# Altium PCB HALL_SENSOR_BOARD.PcbDoc
Units mm, origin at the board's own origin, x right, y up, seen from the top; angles counter-clockwise.
Board outline 80 x 80 mm, 2 copper layers (Top Layer, Bottom Layer), stack 1.071 mm thick; 36 components, 22 nets, 90 pads, 18 vias.
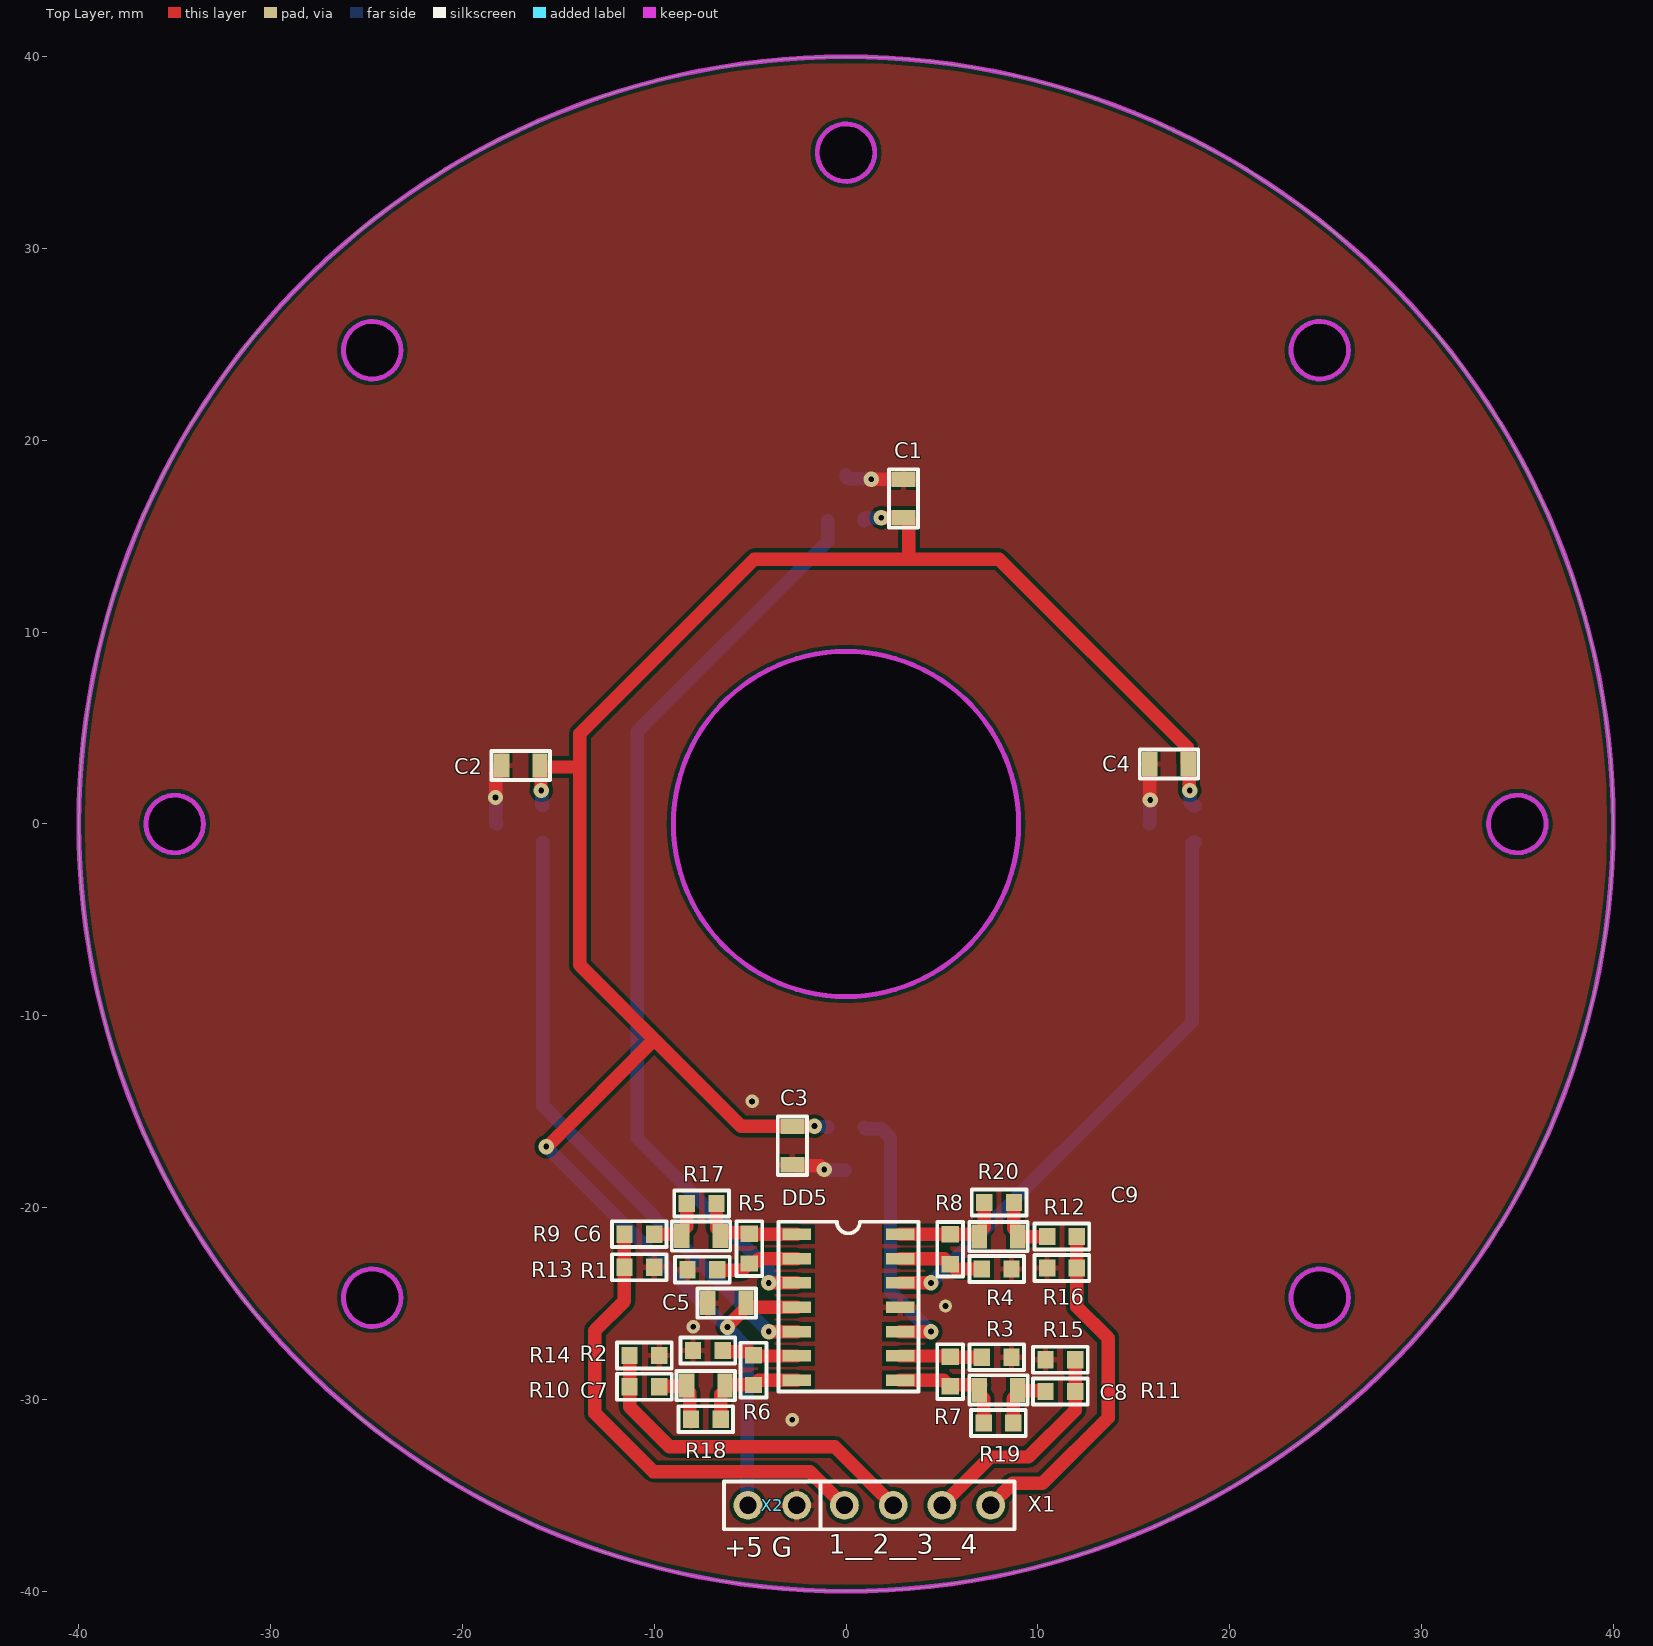
[diagram p0: Top Layer view]
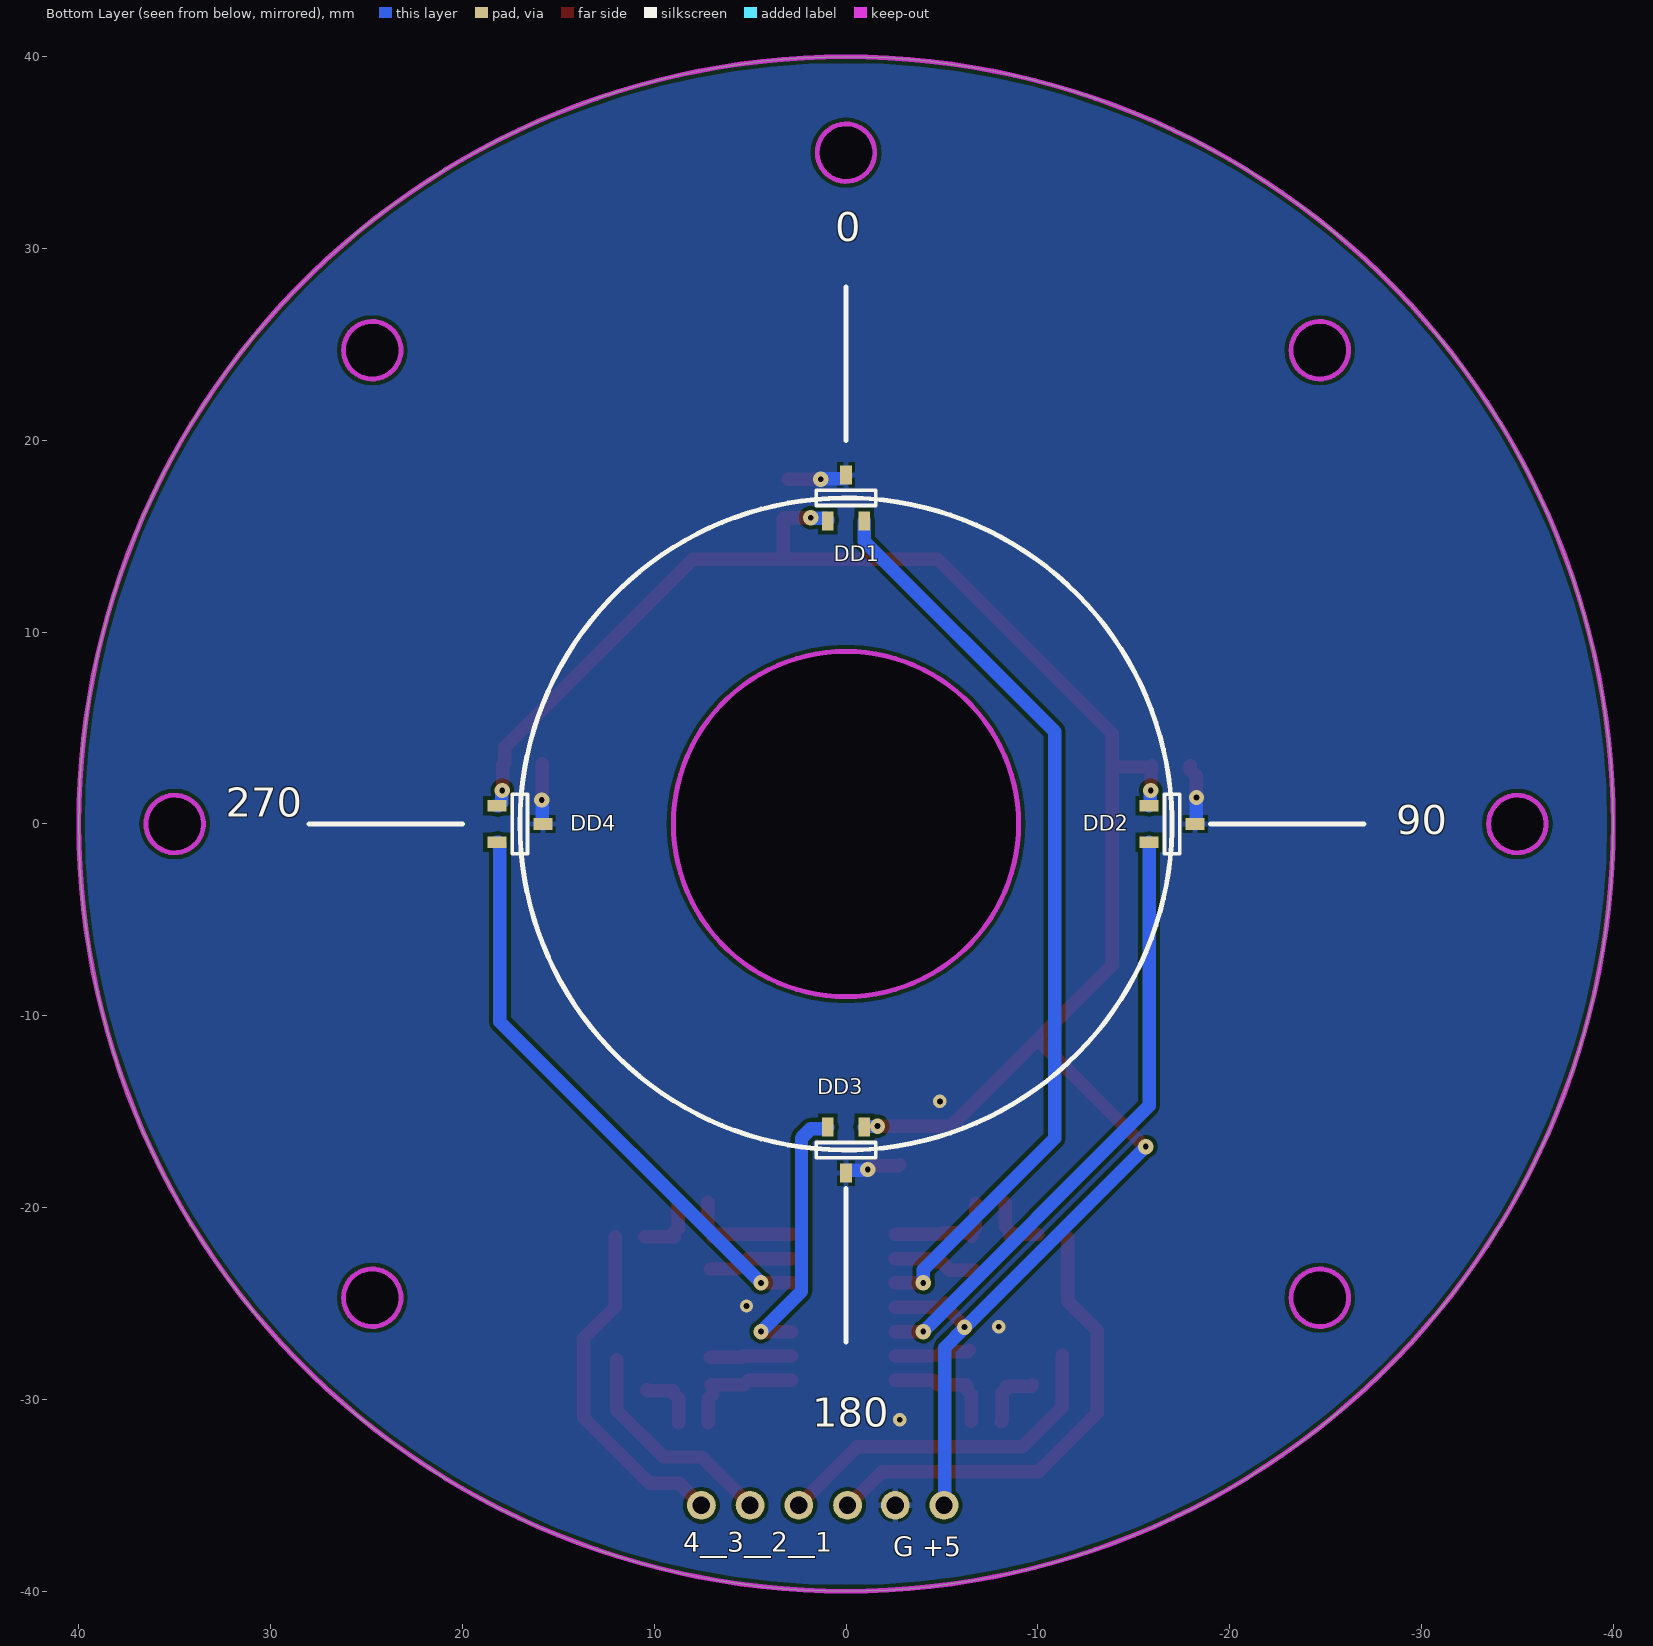
[diagram p1: Bottom Layer view, seen from below]
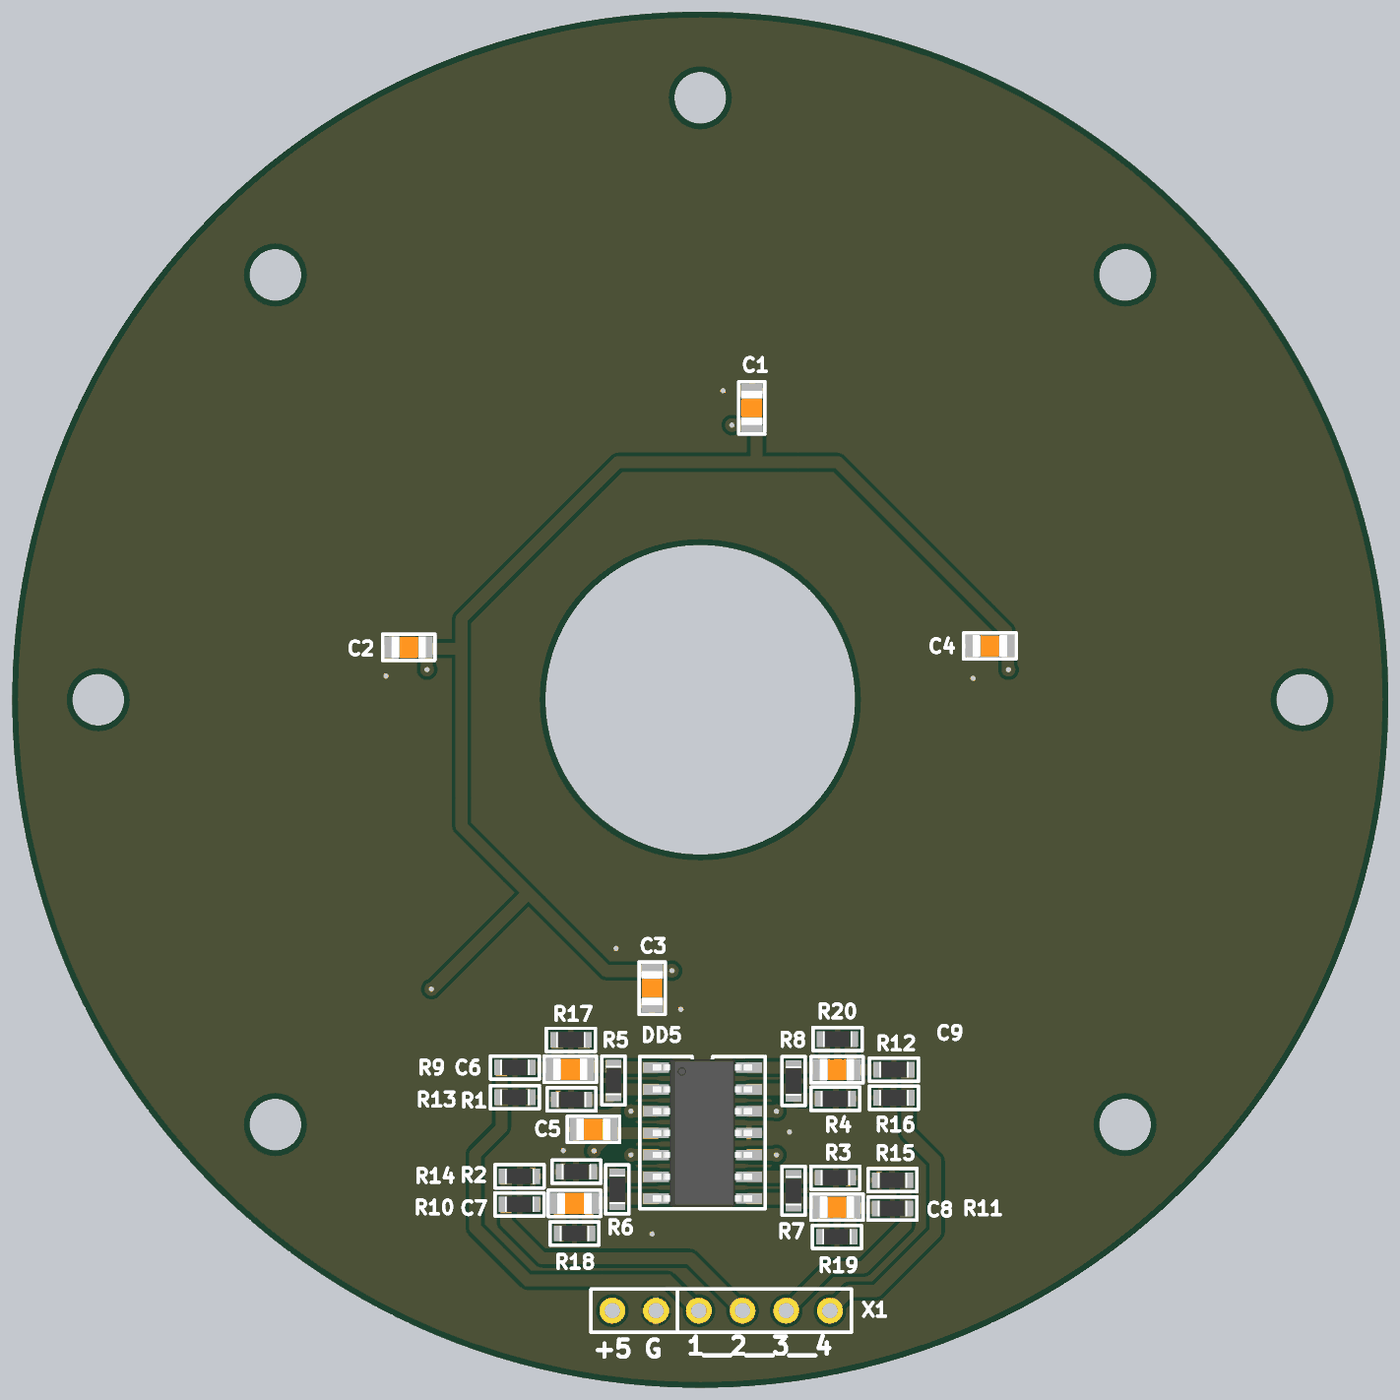
[diagram p2: 3D render of the assembled board from above, using the file's embedded part models]
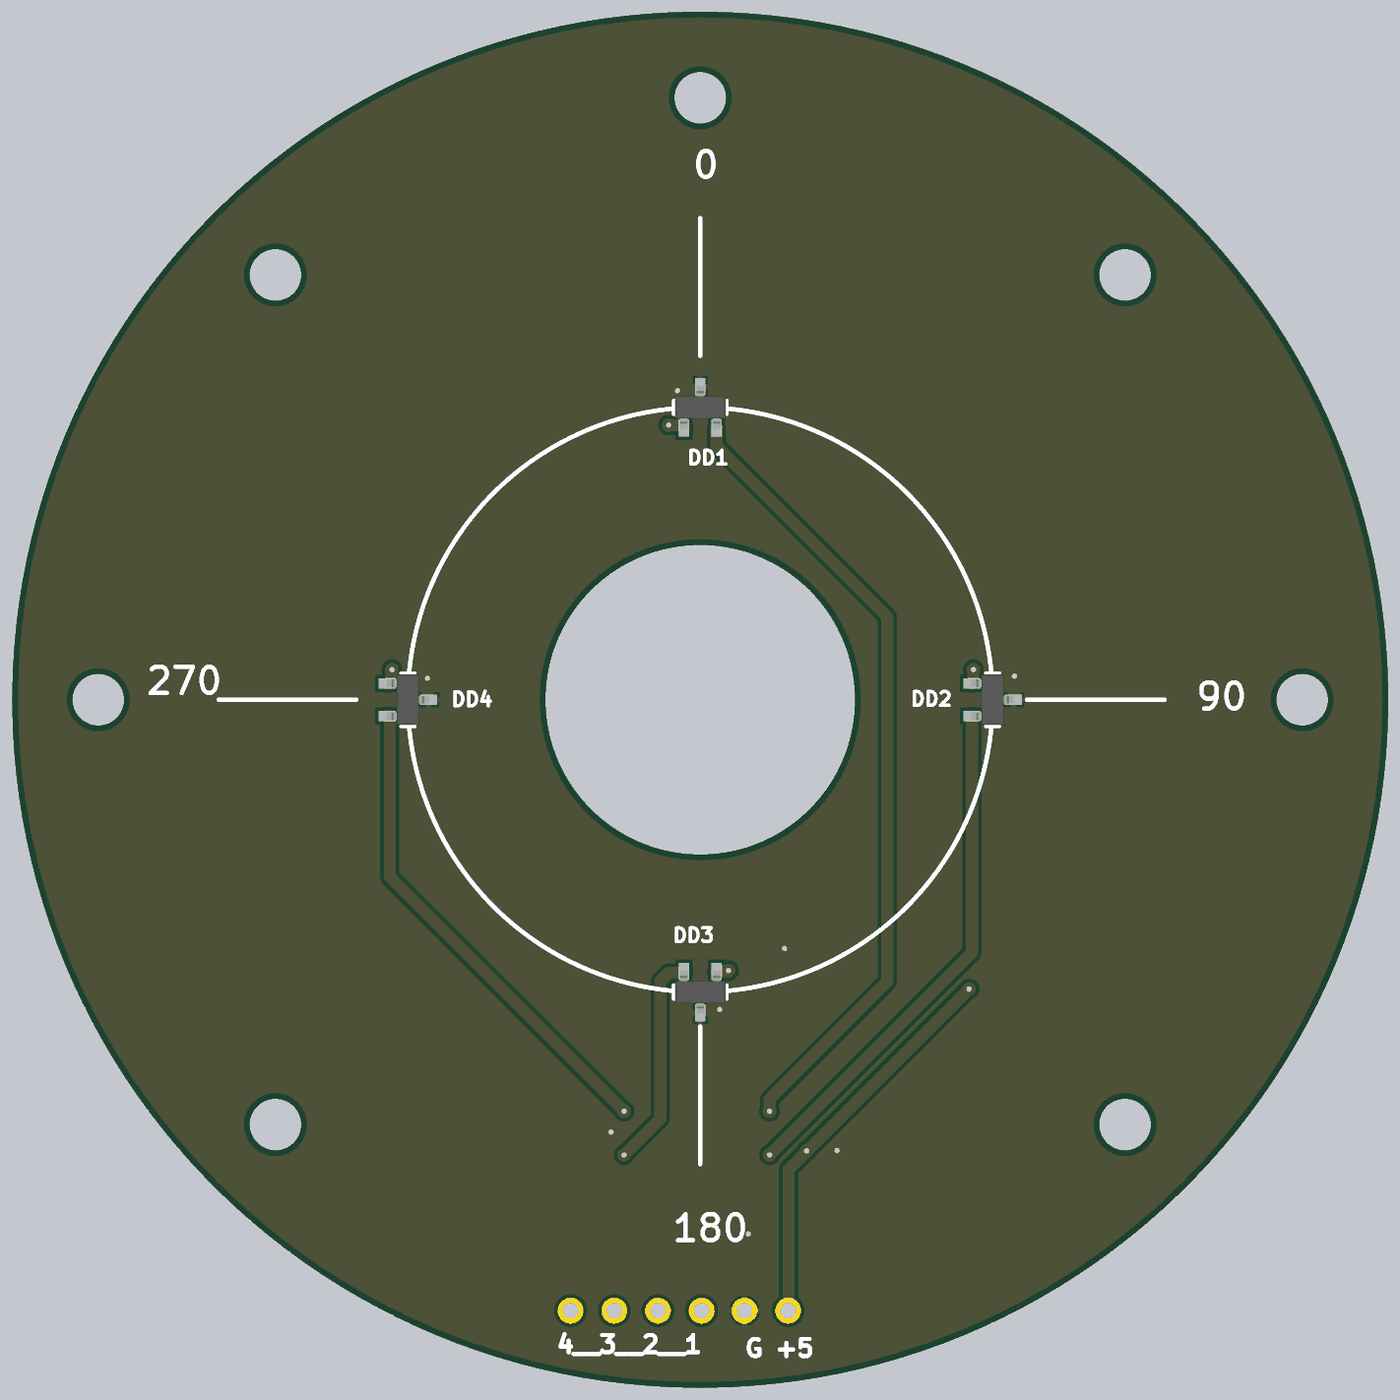
[diagram p3: 3D render of the assembled board from below, using the file's embedded part models]

## Layer stack, top to bottom
Top Solder: solder mask 0.0102, Solder Resist, Dk 3.5
Top Layer: signal copper 0.0356
Dielectric 1: dielectric 1, FR-4, Dk 4.8
Bottom Layer: signal copper 0.0356
Bottom Solder: solder mask 0.0102, Solder Resist, Dk 3.5

## Board outline
-40,0 ccw(c0,0) 0,-40 ccw(c0,0) 40,0 ccw(c0,0) 0,40 ccw(c0,0)
cut-out: -26.2,-24.7 ccw(c-24.7,-24.7) -24.7,-26.2 ccw(c-24.7,-24.7) -23.2,-24.7 ccw(c-24.7,-24.7) -24.7,-23.2 ccw(c-24.7,-24.7)
cut-out: 23.2,-24.7 ccw(c24.7,-24.7) 24.7,-26.2 ccw(c24.7,-24.7) 26.2,-24.7 ccw(c24.7,-24.7) 24.7,-23.2 ccw(c24.7,-24.7)
cut-out: -26.2,24.7 ccw(c-24.7,24.7) -24.7,23.2 ccw(c-24.7,24.7) -23.2,24.7 ccw(c-24.7,24.7) -24.7,26.2 ccw(c-24.7,24.7)
cut-out: 23.2,24.7 ccw(c24.7,24.7) 24.7,23.2 ccw(c24.7,24.7) 26.2,24.7 ccw(c24.7,24.7) 24.7,26.2 ccw(c24.7,24.7)
cut-out: -36.5,0 ccw(c-35,0) -35,-1.5 ccw(c-35,0) -33.5,0 ccw(c-35,0) -35,1.5 ccw(c-35,0)
cut-out: 33.5,0 ccw(c35,0) 35,-1.5 ccw(c35,0) 36.5,0 ccw(c35,0) 35,1.5 ccw(c35,0)
cut-out: -1.5,35 ccw(c0,35) 0,33.5 ccw(c0,35) 1.5,35 ccw(c0,35) 0,36.5 ccw(c0,35)
cut-out: -9,0 ccw(c0,0) 0,-9 ccw(c0,0) 9,0 ccw(c0,0) 0,9 ccw(c0,0)

## Design rules (kind name [scope] priority, off if disabled: settings)
Clearance [All] p1: gap=0.2 ignorepadtopadclearanceinfootprint=FALSE except(0.15: SMDPad-SMDPad)
DiffPairsRouting [All] p1: maxlimit=0.254 minlimit=0.254 mostfreqgap=0.254 substack1={A23D90DD-733B-49C5-8102-56B3D284E3A0} toplayer_{a23d90dd-733b-49c5-8102-56b3d284e3a0}_minwidth=0.381 toplayer_{a23d90dd-733b-49c5-8102-56b3d284e3a0}_maxwidth=0.381 toplayer_{a23d90dd-733b-49c5-8102-56b3d284e3a0}_prefwidth=0.381 bottomlayer_{a23d90dd-733b-49c5-8102-56b3d284e3a0}_minwidth=0.381 bottomlayer_{a23d90dd-733b-49c5-8102-56b3d284e3a0}_maxwidth=0.381 bottomlayer_{a23d90dd-733b-49c5-8102-56b3d284e3a0}_prefwidth=0.381 toplayer_minwidth=0.381 toplayer_maxwidth=0.381 toplayer_prefwidth=0.381 bottomlayer_minwidth=0.381 bottomlayer_maxwidth=0.381 bottomlayer_prefwidth=0.381 substack2={0B3DB408-A969-412D-8C07-BA8AE97219D9} toplayer_{0b3db408-a969-412d-8c07-ba8ae97219d9}_minwidth=0.381 toplayer_{0b3db408-a969-412d-8c07-ba8ae97219d9}_maxwidth=0.381 toplayer_{0b3db408-a969-412d-8c07-ba8ae97219d9}_prefwidth=0.381 bottomlayer_{0b3db408-a969-412d-8c07-ba8ae97219d9}_minwidth=0.381 bottomlayer_{0b3db408-a969-412d-8c07-ba8ae97219d9}_maxwidth=0.381 bottomlayer_{0b3db408-a969-412d-8c07-ba8ae97219d9}_prefwidth=0.381 substack3={378827E6-B38F-4565-9D2F-710D8D441C30} toplayer_{378827e6-b38f-4565-9d2f-710d8d441c30}_minwidth=0.381 toplayer_{378827e6-b38f-4565-9d2f-710d8d441c30}_maxwidth=0.381 toplayer_{378827e6-b38f-4565-9d2f-710d8d441c30}_prefwidth=0.381 bottomlayer_{378827e6-b38f-4565-9d2f-710d8d441c30}_minwidth=0.381 bottomlayer_{378827e6-b38f-4565-9d2f-710d8d441c30}_maxwidth=0.381 bottomlayer_{378827e6-b38f-4565-9d2f-710d8d441c30}_prefwidth=0.381 substack4={1E65D4A7-266F-4925-B814-5E9C4A66F8EE} toplayer_{1e65d4a7-266f-4925-b814-5e9c4a66f8ee}_minwidth=0.381 toplayer_{1e65d4a7-266f-4925-b814-5e9c4a66f8ee}_maxwidth=0.381 toplayer_{1e65d4a7-266f-4925-b814-5e9c4a66f8ee}_prefwidth=0.381 bottomlayer_{1e65d4a7-266f-4925-b814-5e9c4a66f8ee}_minwidth=0.381 bottomlayer_{1e65d4a7-266f-4925-b814-5e9c4a66f8ee}_maxwidth=0.381 bottomlayer_{1e65d4a7-266f-4925-b814-5e9c4a66f8ee}_prefwidth=0.381 substack5={93C5D03E-862D-45F8-9871-970EEA9B3F11} toplayer_{93c5d03e-862d-45f8-9871-970eea9b3f11}_minwidth=0.381 toplayer_{93c5d03e-862d-45f8-9871-970eea9b3f11}_maxwidth=0.381 toplayer_{93c5d03e-862d-45f8-9871-970eea9b3f11}_prefwidth=0.381 bottomlayer_{93c5d03e-862d-45f8-9871-970eea9b3f11}_minwidth=0.381 bottomlayer_{93c5d03e-862d-45f8-9871-970eea9b3f11}_maxwidth=0.381 bottomlayer_{93c5d03e-862d-45f8-9871-970eea9b3f11}_prefwidth=0.381 maxuncoupledlength=12.7
HoleSize [All] p1: absolutevalues=TRUE maxlimit=6 minlimit=0.01 maxpercent=80.000 minpercent=20.000
HoleToHoleClearance [All] p1: gap=0.1 allowstackedmicrovias=TRUE
MinimumSolderMaskSliver [All] p1: minsoldermaskwidth=0.1
PlaneConnect [All] p1: pad.planeconnectstyle=Relief pad.reliefexpansion=0.5 pad.reliefentries=4 pad.reliefconductorwidth=0.5 pad.reliefairgap=0.15 via.planeconnectstyle=Direct via.reliefexpansion=0.5 via.reliefentries=4 via.reliefconductorwidth=0.5 via.reliefairgap=0.15
PolygonConnect VQFN20 [HasFootprint('VQFN20')] p1: connectstyle=Direct reliefconductorwidth=0.254 reliefentries=4 polygonreliefangle="90 Angle" airgapwidth=0.254
PolygonConnect [All] p2: thpad.connectstyle=Relief thpad.reliefconductorwidth=0.3 thpad.reliefentries=4 thpad.polygonreliefangle="90 Angle" thpad.airgapwidth=0.15 smdpad.connectstyle=Relief smdpad.reliefconductorwidth=0.3 smdpad.reliefentries=4 smdpad.polygonreliefangle="90 Angle" smdpad.airgapwidth=0.15 via.connectstyle=Direct via.reliefconductorwidth=0.3 via.reliefentries=4 via.polygonreliefangle="90 Angle" via.airgapwidth=0.15
RoutingVias [All] p1: holewidth=0.1 width=0.1 viastyle="Through Hole" minholewidth=0.11 minwidth=0.1 maxholewidth=2 maxwidth=1
ShortCircuit [All] p1: allowed=TRUE
SilkToSolderMaskClearance [IsPad] p1: minsilkscreentomaskgap=0.1 clearancetoexposedcopper=TRUE
SolderMaskExpansion SolderMaskExpansion_Via [IsVia] p1: expansion=0.102 istentingtop=TRUE
SolderMaskExpansion [All] p2: expansion=0.01 istentingtop=FALSE
UnRoutedNet [All] p1: checkbadconnections=TRUE
Width [All] p1: maxlimit=5 minlimit=0.2 preferedwidth=0.3 substack1={A23D90DD-733B-49C5-8102-56B3D284E3A0} substack2={0B3DB408-A969-412D-8C07-BA8AE97219D9} substack3={378827E6-B38F-4565-9D2F-710D8D441C30} substack4={1E65D4A7-266F-4925-B814-5E9C4A66F8EE} substack5={93C5D03E-862D-45F8-9871-970EEA9B3F11}
22 further rules are at their usual default settings.

## Components (designator, comment, footprint, x,y, rotation, side; value= is the part's Value field where it differs from the comment)
C1 "CAP-NON-POLAR" CAP-0805 3,16.97 r270 top
C2 "CAP-NON-POLAR" CAP-0805 -16.95,3.05 r0 top
C3 "CAP-NON-POLAR" CAP-0805 -2.798,-16.768 r90 top
C4 "CAP-NON-POLAR" CAP-0805 16.84,3.13 r0 top
C5 "CAP-NON-POLAR" CAP-0805 -6.21,-24.98 r0 top
C6 "CAP-NON-POLAR" CAP-0805 -7.56,-21.49 r0 top
C7 "CAP-NON-POLAR" CAP-0805 -7.31,-29.28 r0 top
C8 "CAP-NON-POLAR" CAP-0805 7.95,-29.5 r180 top
C9 "CAP-NON-POLAR" CAP-0805 7.95,-21.51 r180 top
DD1 "49E" SOT23-3 0,17 r90 bottom locked
DD2 "49E" SOT23-3 -17,0 r180 bottom locked
DD3 "49E" SOT23-3 0,-17 r270 bottom locked
DD4 "49E" SOT23-3 17,0 r180 bottom locked
DD5 "LM324" SOIC14 0.13,-25.19 r0 top
R1 "RES-CONST" RES-0603 -7.485,-23.235 r0 top
R2 "RES-CONST" RES-0603 -7.2,-27.445 r0 top
R3 "RES-CONST" RES-0603 7.855,-27.795 r180 top
R4 "RES-CONST" RES-0603 7.855,-23.2 r180 top
R5 "RES-CONST" RES-0603 -5.04,-22.135 r90 top
R6 "RES-CONST" RES-0603 -4.825,-28.47 r270 top
R7 "RES-CONST" RES-0603 5.43,-28.545 r270 top
R8 "RES-CONST" RES-0603 5.43,-22.17 r90 top
R9 "RES-CONST" RES-0603 -10.775,-21.385 r0 top
R10 "RES-CONST" RES-0603 -10.51,-29.34 r0 top
R11 "RES-CONST" RES-0603 11.18,-29.585 r180 top
R12 "RES-CONST" RES-0603 11.26,-21.51 r180 top
R13 "RES-CONST" RES-0603 -10.775,-23.11 r180 top
R14 "RES-CONST" RES-0603 -10.51,-27.705 r180 top
R15 "RES-CONST" RES-0603 11.18,-27.93 r0 top
R16 "RES-CONST" RES-0603 11.26,-23.145 r0 top
R17 "RES-CONST" RES-0603 -7.525,-19.78 r0 top
R18 "RES-CONST" RES-0603 -7.31,-31.03 r0 top
R19 "RES-CONST" RES-0603 7.95,-31.23 r180 top
R20 "RES-CONST" RES-0603 7.98,-19.73 r180 top
X1 "CONN-4-PIN" CONN-PLS-4-2.54mm -0.08,-35.52 r0 top locked
X2 "CONN-2-PIN" CONN-PLS-2-2.54mm -2.57,-35.52 r180 top locked

## Footprints (in the part's own frame and the unit in brackets; to place one, negate y for a bottom-side part, rotate by r counter-clockwise, add the part's x,y. Pads: shape width x height; smd on the part's side, far side on the other; paste and mask are expansions set on the pad)
CAP-0805 [mm]
  rect 0.8x1.25 smd mask+0.015: 1(-1,0) 2(1,0)
  silkscreen extent -1.52,-0.76 1.52,0.76, body extent -1,-0.62 1,0.63, height 0.8
CONN-PLS-2-2.54mm [mm]
  round 1.5 hole 0.9: 1(0,0) 2(2.54,0)
  silkscreen extent -1.25,-1.25 3.79,1.25
CONN-PLS-4-2.54mm [mm]
  round 1.5 hole 0.9: 1(0,0) 2(2.54,0) 3(5.08,0) 4(7.62,0)
  silkscreen extent -1.25,-1.25 8.87,1.25
RES-0603 [mm]
  rect 0.85x0.9 smd: 1(-0.775,0) 2(0.775,0)
  silkscreen extent -1.43,-0.67 1.43,0.67, body extent -0.85,-0.45 0.85,0.45, height 0.55
SOIC14 [mm]
  rect 1.5x0.6 smd: 1(-2.7,3.805) 2(-2.7,2.535) 3(-2.7,1.265) 4(-2.7,-0.005) 5(-2.7,-1.275) 6(-2.7,-2.545) 7(-2.7,-3.815) 8(2.7,-3.815) 9(2.7,-2.545) 10(2.7,-1.275) 11(2.7,-0.005) 12(2.7,1.265) 13(2.7,2.535) 14(2.7,3.805)
  silkscreen extent -3.65,-4.4 3.65,4.45, body extent -2.9,-4.28 2.9,4.28, height 1.75
SOT23-3 [mm]
  rect 1x0.6 smd: 1(-1.2,0.95) 2(-1.2,-0.95) 3(1.2,0)
  silkscreen extent -0.4,-1.55 0.4,1.55, body extent -1.25,-1.46 1.23,1.46, height 1.02

## Via types
v1: diameter 0.8, hole 0.3, Top Layer to Bottom Layer, tented both sides, 14 vias
v2: diameter 0.7, hole 0.3, Top Layer to Bottom Layer, tented both sides, 4 vias

## Nets (pads, with @x,y where several pads share a name; then routed paths per layer and width w, separated by ;. In a path a pad name is that pad's centre, name@x,y a point inside that pad or via, vN(x,y) a via of type N, cw(c..) or ccw(c..) an arc to the next point about the centre after c; other vN are vias at no path point)
+5: C1.2 C2.2 C3.2 C4.2 C5.2 DD1.1 DD2.1 DD3.1 DD4.1 DD5.4 X2.2 | length 115.1
  Top Layer w0.7: C2.2@-15.95,2.825 -15.903,2.778 -15.903,1.769 v1(-15.884,1.75) ; C2.2 -15.95,3.02 -15.9,2.97 -13.88,2.97 ; v1@-15.584,-16.801 -15.553,-16.77 -15.532,-16.77 -9.996,-11.234 ; v1(-6.18,-26.23) -6.161,-26.211 -6.161,-26.156 -5.26,-25.255 -5.26,-25.03 C5.2 ; C5.2@-5.18,-25.175 -5.16,-25.195 DD5.4 ; v1(-1.645,-15.75) -1.654,-15.759 -2.789,-15.759 C3.2 -5.462,-15.768 -9.996,-11.234 ; v1(1.84,15.97) C1.2 3.225,15.97 3.275,15.92 3.275,13.81 ; v1(17.921,1.75) 17.921,1.777 17.89,1.808 17.89,3.08 C4.2 17.79,3.18 17.79,4 7.98,13.81 3.275,13.81 ; -13.88,2.97 -13.88,4.71 -4.78,13.81 3.275,13.81 ; -13.88,2.97 -13.88,-7.35 -9.996,-11.234
  Bottom Layer w0.7: v1(-15.884,1.75) -15.865,1.731 -15.865,1 -15.815,0.95 DD2.1 ; v1(-15.63,-16.82) -15.62,-16.82 -6.26,-26.18 -6.257,-26.18 -6.21,-26.227 v1@-6.21,-26.23 ; v1(-6.18,-26.23) -6.18,-26.257 -5.14,-27.297 X2.2@-5.14,-35.49 ; v1(-1.645,-15.75) -1.626,-15.769 -0.981,-15.769 DD3.1 ; DD1.1 0.95,15.9 1,15.95 DD1.1@1.1,15.95 ; DD1.1@1.101,15.951 1.821,15.951 v1(1.84,15.97) ; v1@17.921,1.723 17.94,1.704 17.94,1.11 18.1,0.95 DD4.1
+IN_1: DD1.2 DD5.3 | length 48.1
  Top Layer w0.7: v1(-4.03,-23.925) DD5.3
  Bottom Layer w0.7: v1(-4.03,-23.925) -4.03,-23.23 -10.88,-16.38 -10.88,4.82 -0.95,14.75 DD1.2
+IN_2: DD2.2 DD5.5 | length 31.9
  Top Layer w0.7: v1(-4.03,-26.465) DD5.5
  Bottom Layer w0.7: DD2.2 -15.8,-14.695 v1(-4.03,-26.465)
+IN_3: DD3.2 DD5.10 | length 14.2
  Top Layer w0.7: DD5.10 v1(4.43,-26.465)
  Bottom Layer w0.7: DD3.2 1,-15.85 1,-15.878 1.828,-15.878 2.32,-16.37 2.32,-24.355 v1(4.43,-26.465)
+IN_4: DD4.2 DD5.12 | length 30.3
  Top Layer w0.7: DD5.12 v1(4.43,-23.925)
  Bottom Layer w0.7: v1(4.43,-23.925) 18.05,-10.305 18.05,-1 18.1,-0.95 DD4.2
-IN_1: DD5.2 R1.2 R5.1 | length 4.4
  Top Layer w0.7: R1.2@-6.67,-23.27 -5.425,-23.27 -4.99,-22.835 -4.71,-22.835 -4.53,-22.655 DD5.2
-IN_2: DD5.6 R2.2 R6.1 | length 3.6
  Top Layer w0.7: R2.2 -6.35,-27.52 -5.025,-27.52 -4.85,-27.695 R6.1 ; R6.1@-4.51,-27.735 DD5.6
-IN_3: DD5.9 R3.2 R7.1 | length 4.3
  Top Layer w0.7: DD5.9 R7.1@5.43,-27.735 ; R7.1 5.462,-27.803 R3.2@7.072,-27.803
-IN_4: DD5.13 R4.2 R8.1 | length 4
  Top Layer w0.7: DD5.13 R8.1@5.115,-22.655 ; R8.1 5.455,-22.945 5.71,-23.2 R4.2
GND: C1.1 C2.1 C3.1 C4.1 C5.1 DD1.3 DD2.3 DD3.3 DD4.3 DD5.11 R1.1 R2.1 R3.1 R4.1 R13.1 R14.1 R15.1 R16.1 X2.1 | length 12.4
  Top Layer w0.7: v1@-18.27,1.407 -18.27,2.505 -17.95,2.825 C2.1 ; C3.1 -2.748,-17.818 -1.349,-17.818 -1.157,-18.01 v1(-1.13,-18.01) ; v1(1.322,17.97) C1.1 ; C4.1 15.84,1.272 v1(15.865,1.247)
  Bottom Layer w0.7: v1(-18.27,1.38) -18.27,0.05 -18.25,0.05 DD2.3 ; v1(-1.13,-18.01) -1.103,-18.01 -1.063,-18.05 DD3.3@-0.05,-18.05 ; DD1.3 0,18.1 0.05,18.05 0.15,18.05 0.211,17.989 1.303,17.989 v1(1.322,17.97) ; DD4.3 15.846,0.046 15.846,1.228 v1(15.865,1.247)
  other v2: -2.798,-31.06 -7.96,-26.211 5.188,-25.13 -4.897,-14.463
NetC6_1: C6.1 R9.2 R17.1 | length 3.3
  Top Layer w0.7: R9.2 -8.61,-21.385 C6.1@-8.56,-21.435 ; C6.1 C6.1@-8.56,-21.435 ; R17.1 -8.3,-21.005 -8.56,-21.265 C6.1@-8.56,-21.435
NetC7_1: C7.1 R10.2 R18.1 | length 3.4
  Top Layer w0.7: R10.2@-9.725,-29.24 -9.725,-29.245 -9.66,-29.31 -8.34,-29.31 -8.34,-29.475 -8.155,-29.66 -8.155,-31.09 R18.1@-8.085,-31.16
NetC8_1: C8.1 R11.2 R19.1 | length 3.2
  Top Layer w0.7: R19.1 8.725,-29.95 9,-29.675 9,-29.543 10.33,-29.543 10.381,-29.491 R11.2@10.381,-29.485
NetC9_1: C9.1 R12.2 R20.1 | length 3.4
  Top Layer w0.7: R20.1 8.755,-21.09 8.95,-21.285 C9.1 ; C9.1 R12.2
OUT_1: C6.2 DD5.1 R5.2 R17.2 | length 5.5
  Top Layer w0.7: R17.2 -6.75,-21.075 -6.56,-21.265 C6.2@-6.56,-21.37 ; C6.2 C6.2@-6.56,-21.37 ; R5.2@-5.08,-21.32 -6.51,-21.32 C6.2@-6.56,-21.37 ; R5.2@-4.825,-21.385 DD5.1
OUT_2: C7.2 DD5.7 R6.2 R18.2 | length 5.8
  Top Layer w0.7: R18.2@-6.535,-31.135 -6.535,-29.73 -6.31,-29.505 C7.2 ; C7.2@-6.275,-29.245 R6.2 -4.8,-29.245 -4.56,-29.005 DD5.7
OUT_3: C8.2 DD5.8 R7.2 R19.2 | length 5.9
  Top Layer w0.7: DD5.8 5.09,-29.005 5.33,-29.245 R7.2@5.358,-29.245 ; R7.2@5.53,-29.245 C8.2@7.016,-29.245 ; C8.2 6.95,-29.725 7.175,-29.95 R19.2
OUT_4: C9.2 DD5.14 R8.2 R20.2 | length 6
  Top Layer w0.7: DD5.14 2.835,-21.39 5.425,-21.39 R8.2 6.9,-21.395 C9.2@6.95,-21.445 ; C9.2 C9.2@6.95,-21.445 ; R20.2 7.205,-21.03 6.95,-21.285 C9.2@6.95,-21.445
V_1: R9.1 R13.2 X1.1 | length 24.8
  Top Layer w0.7: R13.2@-11.55,-23.2 R9.1@-11.55,-21.575 ; R13.2 -11.55,-24.87 -13.09,-26.41 -13.09,-30.71 -10.04,-33.76 -1.89,-33.76 X1.1@-0.13,-35.52
V_2: R10.1 R14.2 X1.2 | length 18.7
  Top Layer w0.7: R14.2 R10.1 -11.285,-30.385 -9.2,-32.47 -0.59,-32.47 X1.2@2.557,-35.617
V_3: R11.1 R15.2 X1.3 | length 11.7
  Top Layer w0.7: X1.3 7.52,-33 9.51,-33 11.955,-30.555 R11.1 ; R11.1@11.955,-29.678 R15.2
V_4: R12.1 R16.2 X1.4 | length 18.1
  Top Layer w0.7: X1.4 8.68,-34.38 10.24,-34.38 13.67,-30.95 13.67,-26.8 12.035,-25.165 R16.2 R12.1

## Polygon pours and split planes (outlines as drawn)
GND on Bottom Layer "NONET_L-01_P-001" (solid, remove dead copper, pour order 0): -40,0 -40,-40 40,-40 40,40 -40,40
GND on Top Layer "NONET_L-01_P-001" (solid, remove dead copper, pour order 1): -40.01,0.01 -40.01,-39.99 39.99,-39.99 39.99,40.01 -40.01,40.01

## Keep-outs
Keep-Out Layer:
  circle w0.254: c-24.7,-24.7 r1.5
  circle w0.254: c24.7,-24.7 r1.5
  circle w0.254: c-24.7,24.7 r1.5
  circle w0.254: c24.7,24.7 r1.5
  circle w0.254: c0,35 r1.5
  circle w0.254: c-35,0 r1.5
  circle w0.254: c35,0 r1.5
  circle w0.254: c0,0 r9
  circle w0.254: c0,0 r40

## Silkscreen, mask and mechanical layers (free items; w line width, h text height)
Top Overlay:
  text "1__2__3__4" at -0.903,-38.039 h1
  text "+5 G" at -6.356,-38.206 h1
Bottom Overlay:
  circle w0.254: c0,0 r17
  lines w0.254: -27,0 -19,0 ; 0,-27 0,-19 ; 0,20 0,28 ; 20,0 28,0
  text "0" at 0.566,30.384 h1.52
  text "270" at 32.346,0.384 h1.52
  text "90" at -28.694,-0.526 h1.52
  text "180" at 1.756,-31.436 h1.52
  text "4__3__2__1" at 8.486,-37.949 h1
  text "G +5" at -2.464,-38.176 h1